# EAGLE board LM2575-1a (EAGLE 5.04)
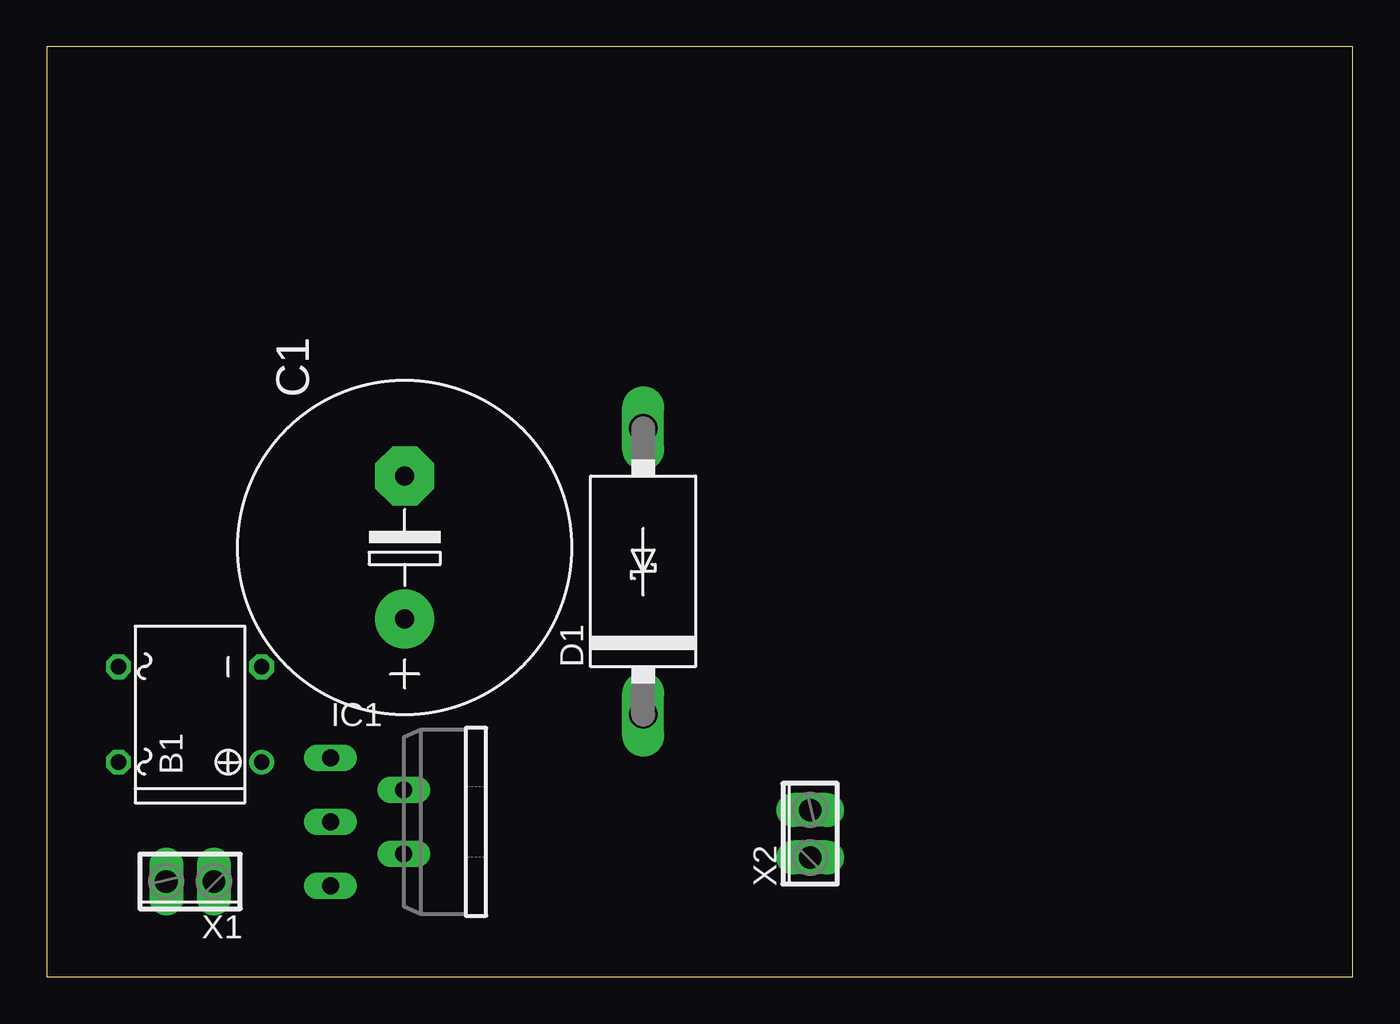
[diagram p0: board, top side]
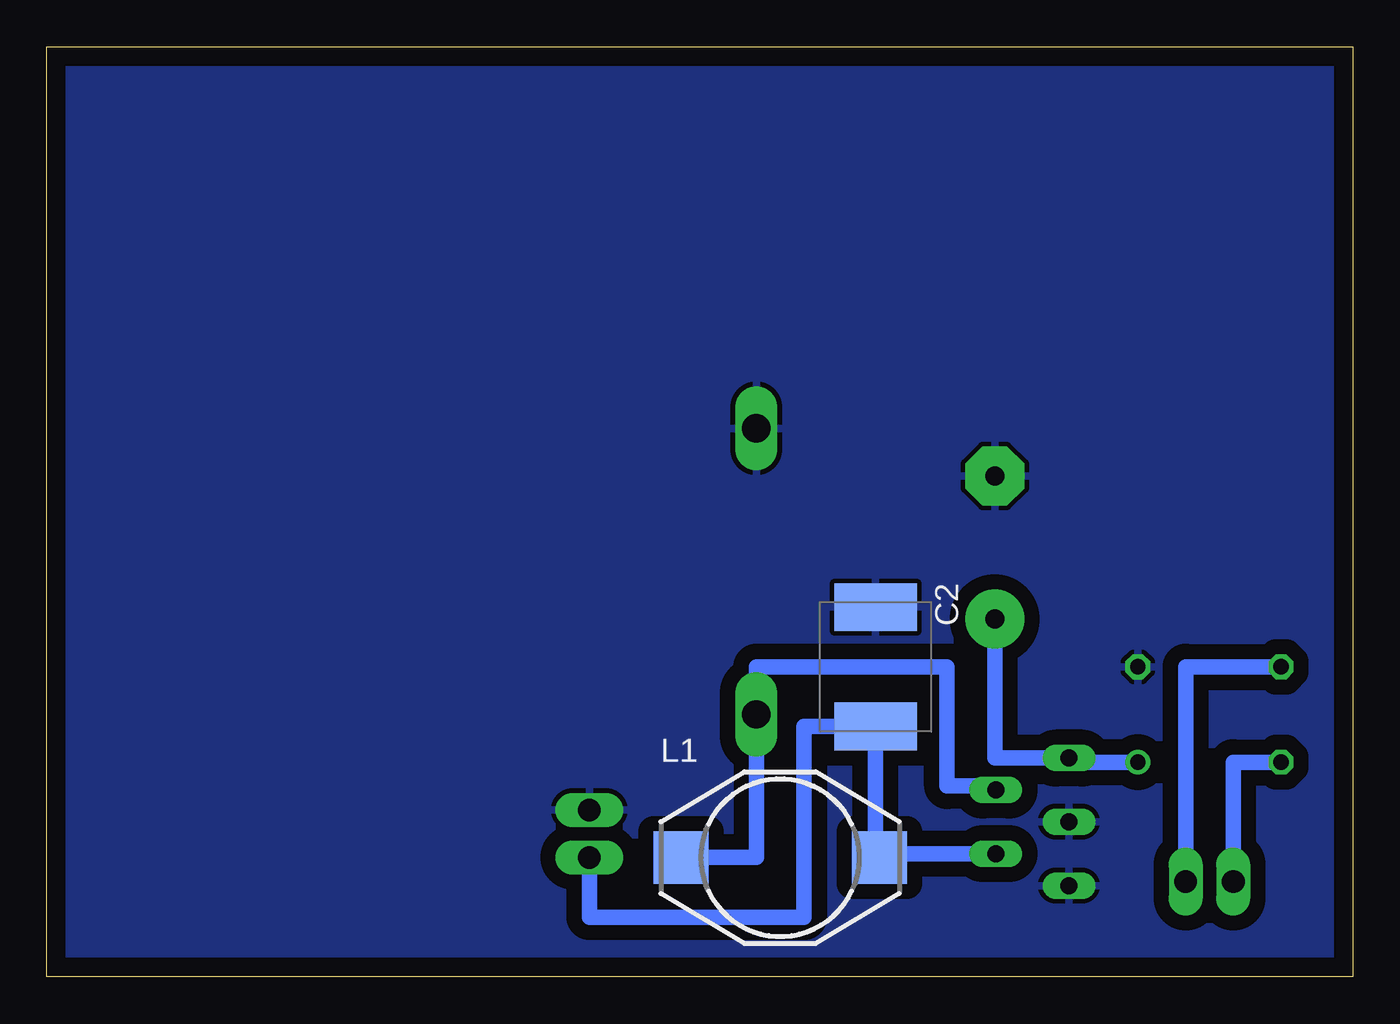
[diagram p1: board, bottom side, seen from below]

Size 69.52 x 49.52 mm. Coordinates in mm from the lower left corner, seen from the top.
Outline: 0,0 69.52,0 69.52,49.52 0,49.52 0,0
Copper layers (1*16): Top 0.035mm / dielectric 1.5mm / Bottom 0.035mm
Design rules "default": minimum track width 10mil, minimum drill 24mil, track to track 8mil, track to pad 8mil, pad to pad 8mil, via to via 8mil, smd to smd 8mil, copper to edge 40mil, drill to drill 8mil, minimum pad ring 10mil, minimum via ring 8mil, stop-mask expansion 4mil, vias tented up to drill 0mil, thermal gap 10mil

## Footprints (pad centres in the part's own frame; a part is rotated, then mirrored left to right if it is on the bottom)
B-DIL = drill 0.813 round: + -2.54,-3.81 | drill 0.813 octagon: - 2.54,-3.81; AC1 2.54,3.81; AC2 -2.54,3.81
E7,5-18 = drill 1.016 pad 3.15 round: + -3.81,0 | drill 1.016 pad 3.15 octagon: - 3.81,0
E/7260-38R = smd 2.55 x 4.4: + 3.175,0; - -3.175,0
DO201T15 = drill 1.499 long: A 7.62,0; C -7.62,0
TO220-5 = drill 0.9 long: 1 -3.4,-8.4; 2 -1.7,-4.5; 3 0,-8.4; 4 1.7,-4.5; 5 3.4,-8.4
DO3316P = smd 2.92 x 2.79: 1 -5.28,0; 2 5.28,0
2POL254 = drill 1.2 long: 1 -1.27,0; 2 1.27,0

## Placement (x,y rotation side)
B1  [B-DIL]  7.62,13.97 90 top
C1  [E7,5-18]  19.05,22.86 90 top
C2  [E/7260-38R]  25.4,16.51 270 bottom
D1  [DO201T15]  31.75,21.59 90 top
IC1  LM2575T  [TO220-5]  23.5,8.26 270 top
L1  [DO3316P]  30.48,6.35 0 bottom
X1  [2POL254]  7.62,5.08 180 top
X2  [2POL254]  40.64,7.62 90 top

## Library data of the parts
B1 = rectifier
C1 C2 = rcl
D1 = diode
IC1 = v-reg-3
L1 = inductor-coilcraft
X1 X2 = con-phoenix-254

## Nets
GND: B1.- C1.- C2.- D1.A IC1.3 IC1.5 X2.2
N$1: D1.C IC1.2 L1.1
N$2: B1.+ C1.+ IC1.1
N$3: C2.+ IC1.4 L1.2 X2.1
N$4: B1.AC1 X1.1
N$5: B1.AC2 X1.2

## Tracks (layer width: path | path; a pad name or v marks a point on that pad's centre or on a via)
GND
  pour Bottom (isolate 0.813): 0,49.53 69.85,49.53 69.85,0 0,0
N$1
  Bottom 0.813: IC1.2 19,10.16 21.59,10.16 21.59,16.51 31.75,16.51 D1.C 31.75,6.35 L1.1
N$2
  Bottom 0.813: B1.+ 15.1,11.43 IC1.1 19.05,11.65 C1.+
N$3
  Bottom 0.813: IC1.4 25.2,6.55 L1.2 25.4,6.35 C2.+ 29.21,13.34 29.21,6.35 29.21,3.17 40.64,3.17 X2.1
N$4
  Bottom 0.813: B1.AC1 8.89,16.51 X1.1
N$5
  Bottom 0.813: B1.AC2 6.35,11.43 X1.2